# Altium PCB pcb.PcbDoc
Units mm, origin at the board's own origin, x right, y up, seen from the top; angles counter-clockwise.
Board outline 50 x 22 mm, 2 copper layers (Top Layer, Bottom Layer), stack 1.58 mm thick; 35 components, 21 nets, 103 pads, 67 vias.
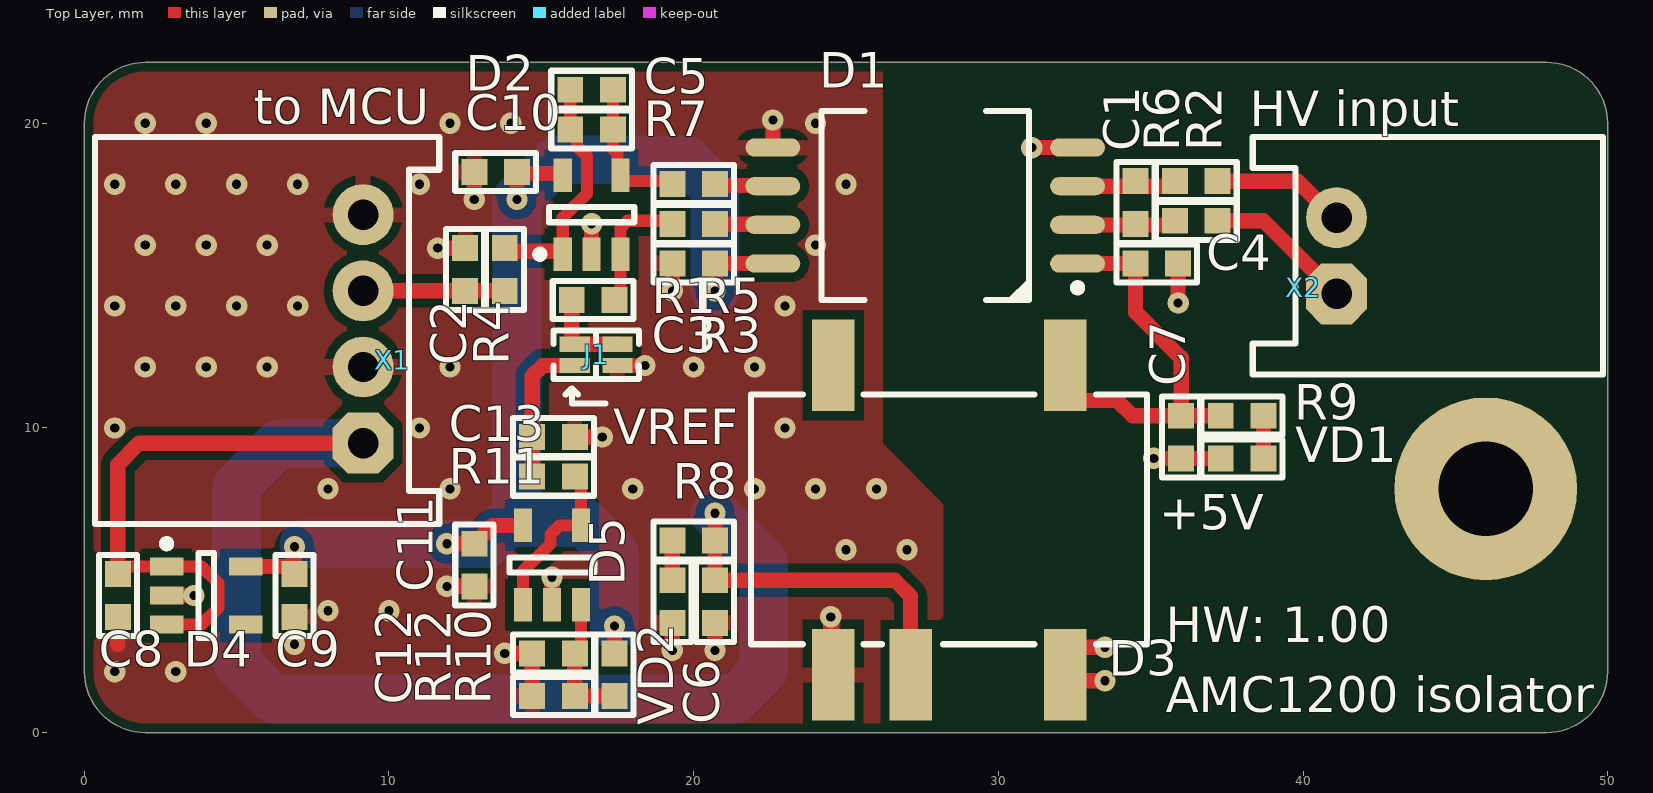
[diagram p0: Top Layer view]
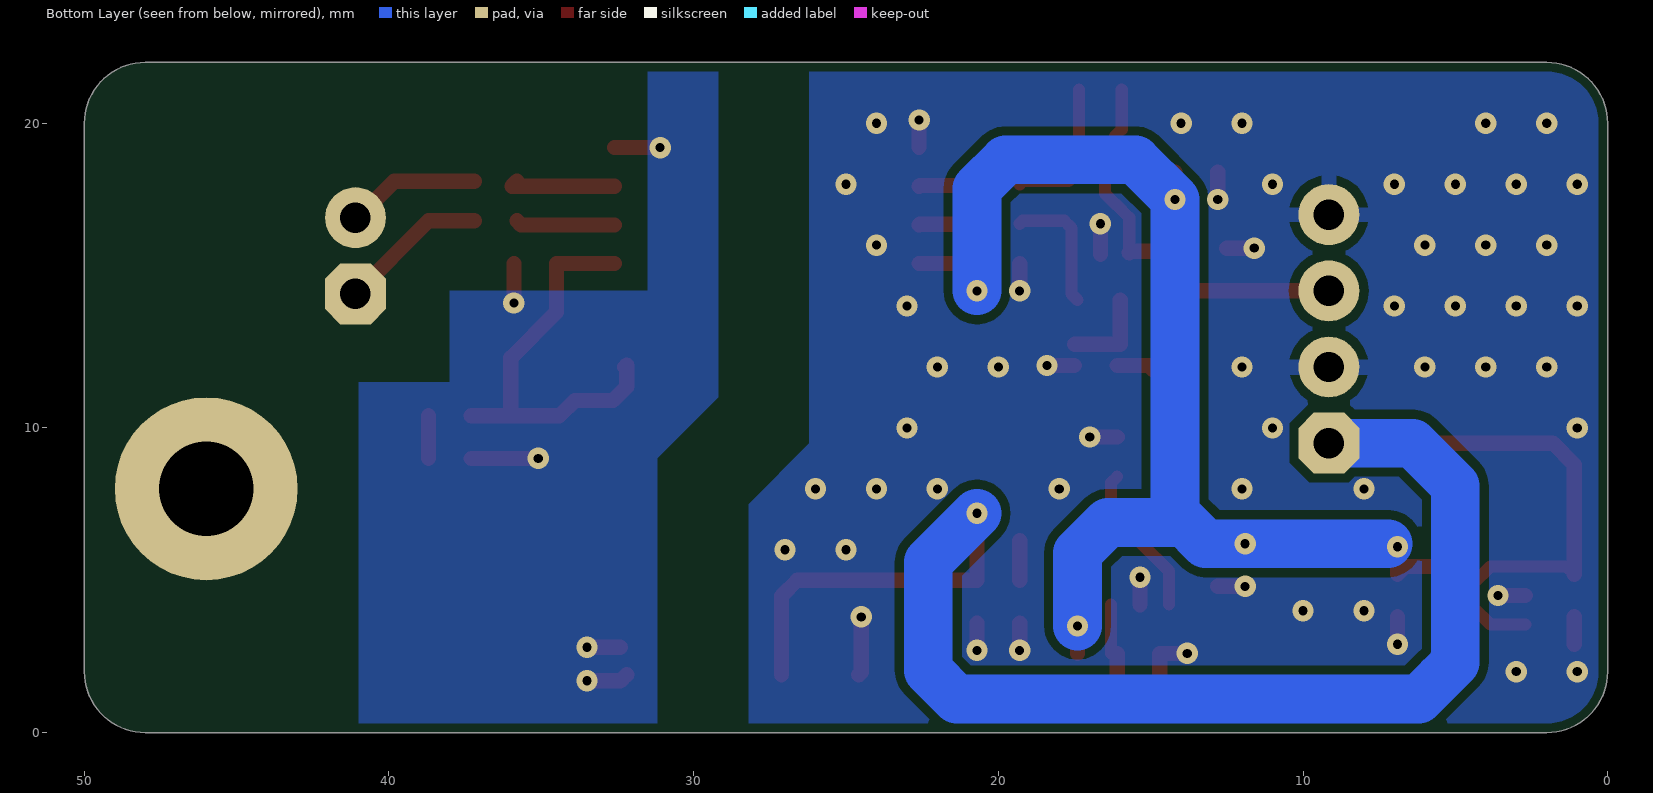
[diagram p1: Bottom Layer view, seen from below]
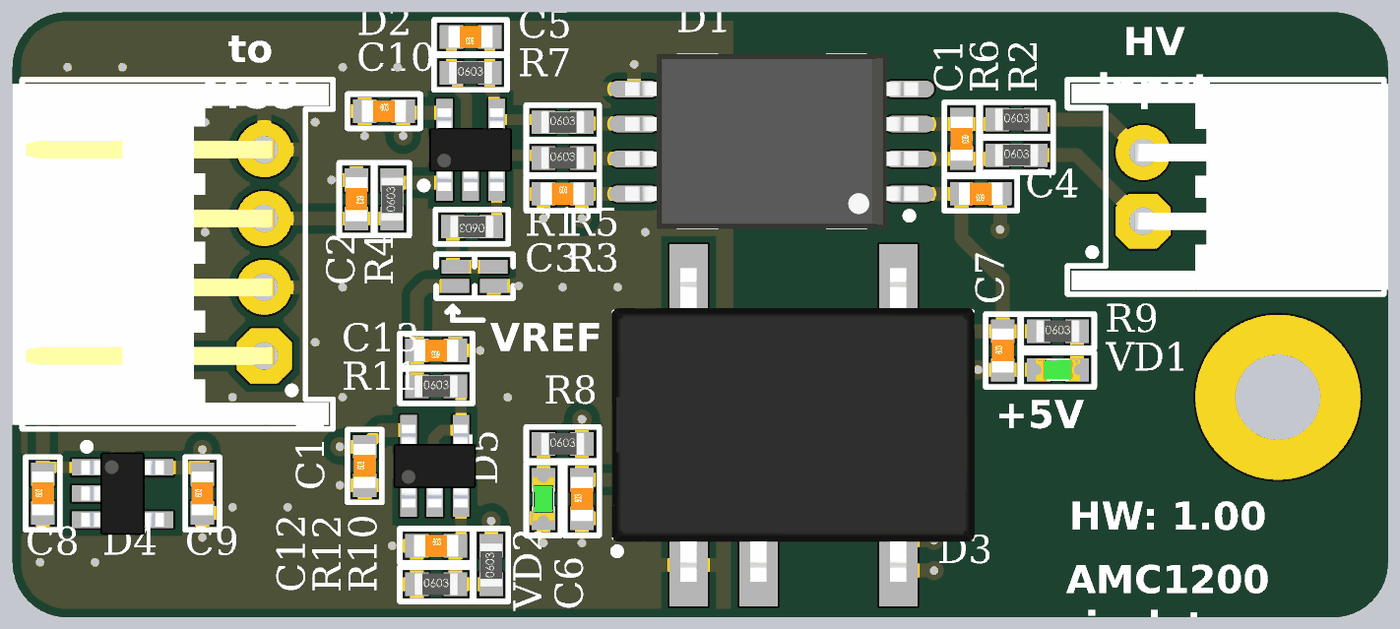
[diagram p2: 3D render of the assembled board from above, using the file's embedded part models]

## Layer stack, top to bottom
Top Solder: solder mask 0.0102, Solder Resist, Dk 3.5
Top Layer: signal copper 0.0356
Dielectric 1: dielectric 1.509, FR-4, Dk 4.8
Bottom Layer: signal copper 0.0356
Bottom Solder: solder mask 0.0102, Solder Resist, Dk 3.5

## Board outline
2,0 cw(c2,2) 0,2 0,20 cw(c2,20) 2,22 48,22 cw(c48,20) 50,20 50,2 cw(c48,2) 48,0

## Design rules (kind name [scope] priority, off if disabled: settings)
BoardOutlineClearance [All] p1: gap=0.3 ignorepadtopadclearanceinfootprint=FALSE
Clearance Clearance_MultiLayerPad [OnLayer('Multi-Layer') and IsPad] p1: gap=0.3 ignorepadtopadclearanceinfootprint=FALSE except(0: Arc-Hole Track-Hole SMDPad-Hole THPad-Hole Via-Hole Fill-Hole Poly-Hole Region-Hole Text-Hole)
Clearance Clearance_Polygon [InPolygon] p2: gap=0.2 ignorepadtopadclearanceinfootprint=FALSE except(0: Arc-Hole Track-Hole SMDPad-Hole THPad-Hole Via-Hole Fill-Hole Poly-Hole Region-Hole Text-Hole; 0.3: Arc-Poly Arc-Region Track-Poly Track-Region SMDPad-Poly SMDPad-Region THPad-Poly THPad-Region Via-Poly Via-Region Fill-Poly Fill-Region Poly-Poly Poly-Region Region-Region)
Clearance [All] p3: gap=0.2 ignorepadtopadclearanceinfootprint=FALSE except(0: Arc-Hole Track-Hole SMDPad-Hole THPad-Hole Via-Hole Fill-Hole Poly-Hole Region-Hole Text-Hole)
ComponentClearance [All] p1: gap=0.2 collisioncheckmode=3 verticalgap=0.2 showdistances=FALSE
DiffPairsRouting [All] p1: maxlimit=0.4 minlimit=0.2 mostfreqgap=0.2 toplayer_minwidth=0.2 toplayer_maxwidth=0.3 toplayer_prefwidth=0.2 bottomlayer_minwidth=0.2 bottomlayer_maxwidth=0.3 bottomlayer_prefwidth=0.2 maxuncoupledlength=12.7
Height [All] p1: minheight=0 maxheight=50 prefheight=12.7
HoleSize [All] p1: absolutevalues=TRUE maxlimit=10 minlimit=0.2 maxpercent=80.000 minpercent=20.000
HoleToHoleClearance [All] p1: gap=0.3 allowstackedmicrovias=TRUE
MinimumSolderMaskSliver [All] p1: minsoldermaskwidth=0.05
PlaneClearance [All] p1: clearance=0.5
PlaneConnect [All] p1: planeconnectstyle=Relief reliefexpansion=0.5 reliefentries=4 reliefconductorwidth=0.5 reliefairgap=0.3
PolygonConnect PolygonConnect_PadGND [InNet('GND') and IsPad] p1: connectstyle=Relief reliefconductorwidth=0.5 reliefentries=4 polygonreliefangle="90 Angle" airgapwidth=0.3
PolygonConnect PolygonConnect_Via [IsVia] p2: connectstyle=Direct reliefconductorwidth=0.254 reliefentries=4 polygonreliefangle="90 Angle" airgapwidth=0.254
PolygonConnect [All] p3: connectstyle=Relief reliefconductorwidth=0.5 reliefentries=4 polygonreliefangle="90 Angle" airgapwidth=0.3
RoutingTopology [All] p1: topology=Vertical
RoutingVias [All] p1: holewidth=0.2 width=0.4 viastyle="Through Hole" minholewidth=0.2 minwidth=0.4 maxholewidth=0.5 maxwidth=1.2
SilkToSilkClearance [All] p1: silktosilkclearance=0.05
SilkToSolderMaskClearance [IsPad] p1: minsilkscreentomaskgap=0.05 clearancetoexposedcopper=TRUE
SolderMaskExpansion [All] p1: expansion=0.075 istentingtop=FALSE
Width [All] p1: maxlimit=10 minlimit=0.2 preferedwidth=0.2
19 further rules are at their usual default settings.

## Components (designator, comment, footprint, x,y, rotation, side; value= is the part's Value field where it differs from the comment)
C1 "Ceramic capacitor, 330pF, NPO, ±10%, 50V, 603, -55...+125°C" "CAP: 0603" 34.5,17.4 r270 top value=330pF
C2 "Ceramic capacitor, 0.01μF, X7R, ±10%, 50V, 603, -55...+125°C" "CAP: 0603" 12.5,15.2 r270 top value=0.01μF
C3 "Ceramic capacitor, 0.1μF, X7R, ±10%, 50V, 603, -55...+125°C" "CAP: 0603" 20,15.4 r0 top value=0.1μF
C4 "Ceramic capacitor, 0.1μF, X7R, ±10%, 50V, 603, -55...+125°C" "CAP: 0603" 35.2,15.4 r180 top value=0.1μF
C5 "Ceramic capacitor, 180pF, NPO, ±5%, 50V, 603, -55...+125°C" "CAP: 0603" 16.65,21.1 r180 top value=180pF
C6 "Ceramic capacitor, 4.7μF, X7R, ±10%, 6.3V, 603, -55...+125°C" "CAP: 0603" 20.7,4.3 r90 top value=4.7μF
C7 "Ceramic capacitor, 4.7μF, X7R, ±10%, 6.3V, 603, -55...+125°C" "CAP: 0603" 36,9.7 r90 top value=4.7μF
C8 "Ceramic capacitor, 0.1μF, X7R, ±10%, 50V, 603, -55...+125°C" "CAP: 0603" 1.1,4.5 r90 top value=0.1μF
C9 "Ceramic capacitor, 0.1μF, X7R, ±10%, 50V, 603, -55...+125°C" "CAP: 0603" 6.9,4.5 r90 top value=0.1μF
C10 "Ceramic capacitor, 0.1μF, X7R, ±10%, 50V, 603, -55...+125°C" "CAP: 0603" 13.5,18.4 r0 top value=0.1μF
C11 "Ceramic capacitor, 0.1μF, X7R, ±10%, 50V, 603, -55...+125°C" "CAP: 0603" 12.8,5.5 r90 top value=0.1μF
C12 "Ceramic capacitor, 0.1μF, X7R, ±10%, 50V, 603, -55...+125°C" "CAP: 0603" 15.4,2.6 r0 top value=0.1μF
C13 "Ceramic capacitor, 0.1μF, X7R, ±10%, 50V, 603, -55...+125°C" "CAP: 0603" 15.4,9.7 r180 top value=0.1μF
D1 "IC isolator amplifier, Differential, 100 kHz, 2.7...5.5V, -40...+105°C, 8-SOIC" 8-SOIC-W 27.6,17.3 r180 top
D2 "IC op amplifier, Rail-to-Rail, 20 MHz, 2.7...5.5V, -40...+125°C, SOT23-5" SOT23-5 16.65,17 r90 top
D3 "DC/DC converter, isolator, 5V 200mA, -40...+105°C, SMD-8" "MOD: B0505XT-1WR3" 24.58,1.9 r0 top
D4 "Linear voltage regulator, input 4...24V, 0.5V, output 3.3V, 0.15A, -40...+85°C, SOT23-6" SOT23-5 4,4.5 r0 top
D5 "IC op amplifier, Rail-to-Rail, 20 MHz, 2.7...5.5V, -40...+125°C, SOT23-5" SOT23-5 15.35,5.5 r90 top
J1 "=Valuemanufacturerpartnumber" "CON: JUMPER x2" 16.1,12.4 r270 top
R1 "Resistor film, 1k, ±1%, 603, 0.1W, -55...+125°C" "RES: 0603" 16.7,14.2 r180 top value=1k
R2 "Resistor film, 22R, ±1%, 603, 0.1W, -55...+125°C" "RES: 0603" 36.5,16.8 r0 top value=22R
R3 "Resistor film, 1k3, ±1%, 603, 0.1W, -55...+125°C" "RES: 0603" 20,16.7 r0 top value=1k3
R4 "Resistor film, 120R, ±5%, 603, 0.1W, -55...+125°C" "RES: 0603" 13.8,15.2 r90 top value=120R
R5 "Resistor film, 1k3, ±1%, 603, 0.1W, -55...+125°C" "RES: 0603" 20,18 r0 top value=1k3
R6 "Resistor film, 22R, ±1%, 603, 0.1W, -55...+125°C" "RES: 0603" 36.5,18.1 r0 top value=22R
R7 "Resistor film, 1k, ±1%, 603, 0.1W, -55...+125°C" "RES: 0603" 16.65,19.8 r0 top value=1k
R8 "Resistor film, 1k, ±1%, 603, 0.1W, -55...+125°C" "RES: 0603" 20,6.3 r0 top value=1k
R9 "Resistor film, 1k, ±1%, 603, 0.1W, -55...+125°C" "RES: 0603" 38,10.4 r0 top value=1k
R10 "Resistor film, 1k, ±1%, 603, 0.1W, -55...+125°C" "RES: 0603" 17.4,1.9 r90 top value=1k
R11 "Resistor film, 22R, ±1%, 603, 0.1W, -55...+125°C" "RES: 0603" 15.4,8.4 r0 top value=22R
R12 "Resistor film, 1k, ±1%, 603, 0.1W, -55...+125°C" "RES: 0603" 15.4,1.2 r0 top value=1k
VD1 "LED, 20mA, 2V, 603, -55...+150°C" "LED: 0603G" 38,9 r180 top
VD2 "LED, 20mA, 2V, 603, -55...+150°C" "LED: 0603G" 19.3,4.3 r270 top
X1 "Connector, 4pin, 2.54mm, 250VAC, 3A" "CON: CWF-4R" 9.15,13.25 r90 top
X2 "Connector, 2pin, 2.54mm, 250VAC, 3A" "CON: CWF-2R" 41.1,15.65 r90 top

## Footprints (in the part's own frame and the unit in brackets; to place one, negate y for a bottom-side part, rotate by r counter-clockwise, add the part's x,y. Pads: shape width x height; smd on the part's side, far side on the other; paste and mask are expansions set on the pad)
8-SOIC-W [mm] "pitch 1.27 mm, isolator"
  oval 1.8x0.6 smd: 1(-5,1.905) 2(-5,0.635) 3(-5,-0.635) 4(-5,-1.905) 5(5,-1.905) 6(5,-0.635) 7(5,0.635) 8(5,1.905)
  round 0.5 on Mech1: ""(-4.8,2.7)
  silkscreen extent -5.13,-3.1 3.4,3.1, body extent -5.32,-3.18 5.32,3.17, height 1.7
"CAP: 0603" [mm]
  rect 0.85x0.85 smd: 1(-0.7,0) 2(0.7,0)
  silkscreen extent -1.33,-0.63 1.33,0.63, body extent -0.8,-0.4 0.8,0.4, height 0.3
"CON: CWF-2R" [mm]
  oct 2x2 hole 1: 1(-1.25,0)
  round 2 hole 1: 2(1.25,0)
  round 0.5 on Mech1: ""(-3.3,2.2)
  round 0.5 on Top Overlay: ""(-2.375,1.85)
  silkscreen extent -3.9,-8.75 3.9,2.75, body extent -3.75,-8.9 3.75,2.6, height 5.85
"CON: CWF-4R" [mm]
  oct 2x2 hole 1: 1(-3.75,0)
  round 2 hole 1: 2(-1.25,0) 3(1.25,0) 4(3.75,0)
  round 0.5 on Mech1: ""(-5.8,-1.9)
  round 0.5 on Top Overlay: ""(-5,-1)
  silkscreen extent -6.4,-2.5 6.3,8.8, body extent -6.25,-2.35 6.15,9.15, height 5.8
"CON: JUMPER x2" [mm]
  rect 0.5x1 smd: 1(-0.35,1.4) 2(0.35,1.4) 3(-0.35,0) 4(0.35,0)
  silkscreen extent -0.8,-0.7 0.8,2.1
"LED: 0603G" [mm]
  rect 0.85x0.85 smd: 1(-0.7,0) 2(0.7,0)
  silkscreen extent -1.33,-0.63 1.33,0.63, body extent -0.8,-0.4 0.8,0.4, height 0.6
"MOD: B0505XT-1WR3" [mm]
  rect 1.4x3 smd: 1(0,0) 2(2.54,0) 4(7.62,0) 5(7.62,10.16) 8(0,10.16)
  round 0.5 on Top Overlay: ""(-2.6,0.5)
  round 0.5 on Mech1: ""(-2.3,-0.1)
  silkscreen extent -2.7,1 10.3,9.2, body extent -2.8,-0.6 10.4,10.8, height 7.25
"RES: 0603" [mm]
  rect 0.85x0.85 smd: 1(-0.7,0) 2(0.7,0)
  silkscreen extent -1.33,-0.63 1.33,0.63, body extent -0.8,-0.4 0.8,0.4, height 0.44
SOT23-5 [mm] "pitch 0.95 mm"
  rect 1.1x0.6 smd: 1(-1.3,0.95) 2(-1.3,0) 3(-1.3,-0.95) 4(1.3,-0.95) 5(1.3,0.95)
  round 0.5 on Mech1: ""(-1.1,1.1)
  silkscreen extent -1.42,-1.4 0.25,1.82, body extent -1.5,-1.5 1.5,1.5, height 1.3

## Part data
C1: library part Ceramic_0603, Manufacturer=Samsung, Package=0603, PartNumber=CL10C331JB8NNNC, Temperature=-55...+125°C, Tolerance=±10%, TypeCapacitor="Ceramic capacitor", TypeDielectric=NPO, Voltage=50V, HelpURL=https://www.digikey.com/product-detail/en/samsung-electro-mechanics/CL10C331JB8NNNC/1276-1073-1-ND/3889159, ValueManufacturerPartNumber="Ceramic capacitor, 330pF, NPO, ±10%, 50V, 603, -55...+125°C"
C2: library part Ceramic_0603, Manufacturer=Samsung, Package=0603, PartNumber=CL10B103KB8NNNC, Temperature=-55...+125°C, Tolerance=±10%, TypeCapacitor="Ceramic capacitor", TypeDielectric=X7R, Voltage=50V, HelpURL=https://www.digikey.com/product-detail/en/samsung-electro-mechanics/CL10B103KB8NNNC/1276-1009-1-ND/3889095, ValueManufacturerPartNumber="Ceramic capacitor, 0.01μF, X7R, ±10%, 50V, 603, -55...+125°C"
C3 C4 C8 C9 C10 C11 C12 C13: library part Ceramic_0603, Manufacturer=Samsung, Package=0603, PartNumber=CL10B104KB8WPND, Temperature=-55...+125°C, Tolerance=±10%, TypeCapacitor="Ceramic capacitor", TypeDielectric=X7R, Voltage=50V, HelpURL=https://www.digikey.com/product-detail/en/samsung-electro-mechanics/CL10B104KB8WPND/1276-CL10B104KB8WPNDCT-ND/11488014, ValueManufacturerPartNumber="Ceramic capacitor, 0.1μF, X7R, ±10%, 50V, 603, -55...+125°C"
C5: library part Ceramic_0603, Manufacturer=Samsung, Package=0603, PartNumber=CL10C181JB8NNNC, Temperature=-55...+125°C, Tolerance=±5%, TypeCapacitor="Ceramic capacitor", TypeDielectric=NPO, Voltage=50V, HelpURL=https://www.digikey.com/en/products/detail/samsung-electro-mechanics/CL10C181JB8NNNC/3886913, ValueManufacturerPartNumber="Ceramic capacitor, 180pF, NPO, ±5%, 50V, 603, -55...+125°C"
C6 C7: library part Ceramic_0603, Manufacturer=Samsung, Package=0603, PartNumber=CL10B475KQ8NQNC, Temperature=-55...+125°C, Tolerance=±10%, TypeCapacitor="Ceramic capacitor", TypeDielectric=X7R, Voltage=6.3V, HelpURL=https://www.digikey.com/en/products/detail/samsung-electro-mechanics/CL10B475KQ8NQNC/3887745, ValueManufacturerPartNumber="Ceramic capacitor, 4.7μF, X7R, ±10%, 6.3V, 603, -55...+125°C"
D1: library part AMC1200BDWVR, "Isolator amplifier", Manufacturer="Texas Instruments", Package=8-SOIC, Temperature=-40...+105°C, ComponentType="IC isolator amplifier", GainBandwidth="100 kHz", HelpURL=https://www.digikey.com/product-detail/en/texas-instruments/AMC1200BDWVR/296-39898-1-ND/5177775, OutputType=Differential, PartNumber=AMC1200BDWVR, Supply=2.7...5.5V, ValueManufacturerPartNumber="IC isolator amplifier, Differential, 100 kHz, 2.7...5.5V, -40...+105°C, 8-SOIC"
D2 D5: library part TSV991ILT, "OP amplifier", Manufacturer=STMicroelectronics, Package=SOT23-5, Temperature=-40...+125°C, ComponentType="IC op amplifier", GainBandwidth="20 MHz", HelpURL=https://www.digikey.com/product-detail/en/stmicroelectronics/TSV991ILT/497-6001-1-ND/1578484, OutputType=Rail-to-Rail, PartNumber=TSV991ILT, Supply=2.7...5.5V, ValueManufacturerPartNumber="IC op amplifier, Rail-to-Rail, 20 MHz, 2.7...5.5V, -40...+125°C, SOT23-5"
D3: library part B0505XT-1WR3, "DC/DC converter", Manufacturer=Mornsun, OutputVoltage="5V 200mA", Package=SMD-8, Temperature=-40...+105°C, ComponentType="DC/DC converter", HelpURL=https://www.mornsun-power.com/html/products/35/0.25-3w-smd.html, OutputType=isolator, PartNumber=B0505XT-1WR3, ValueManufacturerPartNumber="DC/DC converter, isolator, 5V 200mA, -40...+105°C, SMD-8"
D4: library part AP2204K-3.3TRG1, "Linear voltage regulator", CurrentOutput=0.15A, Manufacturer="Diodes Incorporated", Package=SOT23-6, Temperature=-40...+85°C, VoltageInput="input 4...24V", VoltageOutput="output 3.3V", ComponentType="Linear voltage regulator", HelpURL=https://www.digikey.com/product-detail/en/diodes-incorporated/AP2204K-3.3TRG1/AP2204K-3.3TRG1DICT-ND/4505288, MaxDropout=0.5V, PartNumber=AP2204K-3.3TRG1, ValueManufacturerPartNumber="Linear voltage regulator, input 4...24V, 0.5V, output 3.3V, 0.15A, -40...+85°C, SOT23-6"
J1: library part Jumper_double, CommentText="\"Перемычка\""
R1 R7 R8 R9 R10 R12: library part Resistor_0603, Manufacturer=Yageo, Package=0603, PartNumber=RC0603FR-071KL, Power=0.1W, Temperature=-55...+125°C, Tolerance=±1%, TypeResistor="Resistor film", HelpURL=https://www.digikey.com/product-detail/en/yageo/RC0603FR-071KL/311-1-00KHRCT-ND/729790, ValueManufacturerPartNumber="Resistor film, 1k, ±1%, 603, 0.1W, -55...+125°C"
R2 R6 R11: library part Resistor_0603, Manufacturer=Yageo, Package=0603, PartNumber=RC0603FR-0722RL, Power=0.1W, Temperature=-55...+125°C, Tolerance=±1%, TypeResistor="Resistor film", HelpURL=https://www.digikey.com/product-detail/en/yageo/RC0603FR-0722RL/311-22-0HRCT-ND/730002, ValueManufacturerPartNumber="Resistor film, 22R, ±1%, 603, 0.1W, -55...+125°C"
R3 R5: library part Resistor_0603, Manufacturer=Yageo, Package=0603, PartNumber=RC0603FR-071K3L, Power=0.1W, Temperature=-55...+125°C, Tolerance=±1%, TypeResistor="Resistor film", HelpURL=https://www.digikey.com/product-detail/en/yageo/RC0603FR-071K3L/311-1-30KHRCT-ND/729805, ValueManufacturerPartNumber="Resistor film, 1k3, ±1%, 603, 0.1W, -55...+125°C"
R4: library part Resistor_0603, Manufacturer=Yageo, Package=0603, PartNumber=RC0603JR-07120RL, Power=0.1W, Temperature=-55...+125°C, Tolerance=±5%, TypeResistor="Resistor film", HelpURL=https://www.digikey.com/product-detail/en/yageo/RC0603JR-07120RL/311-120GRCT-ND/729653, ValueManufacturerPartNumber="Resistor film, 120R, ±5%, 603, 0.1W, -55...+125°C"
VD1 VD2: library part LED_single, Color=GREEN, Current=20mA, Manufacturer=Wurth, Package=0603, PartNumber=150060VS75000, Temperature=-55...+150°C, VoltageDrop=2V, HelpURL=https://www.digikey.com/product-detail/en/w-rth-elektronik/150060VS75000/732-4980-1-ND/4489904, TypeDiode=LED, ValueManufacturerPartNumber="LED, 20mA, 2V, 603, -55...+150°C"
X1: library part CWF-4, CurrentMax=3A, Manufacturer=Connfly, PartNumber=CWF-4R, VoltageMax=250VAC, CommentText="\"Выход\"", HelpURL=https://www.chipdip.ru/product/cwf-4r-ds1069-4-mr, Multichannel=4pin, Pitch=2.54mm, TypeConnector=Connector, ValueManufacturerPartNumber="Connector, 4pin, 2.54mm, 250VAC, 3A"
X2: library part CWF-2, CurrentMax=3A, Manufacturer=Connfly, PartNumber=CWF-2R, VoltageMax=250VAC, CommentText="\"Вход\"", HelpURL=https://www.chipdip.ru/product/cwf-2r-ds1069-2-mr, Multichannel=2pin, Pitch=2.54mm, TypeConnector=Connector, ValueManufacturerPartNumber="Connector, 2pin, 2.54mm, 250VAC, 3A"

## Free pads (board coordinates)
  round 6 hole 3.1 mask+0.075: MH(46,8)

## Via types
v1: diameter 0.7, hole 0.3, Top Layer to Bottom Layer, tented both sides, 67 vias

## Nets (pads, with @x,y where several pads share a name; then routed paths per layer and width w, separated by ;. In a path a pad name is that pad's centre, name@x,y a point inside that pad or via, vN(x,y) a via of type N, cw(c..) or ccw(c..) an arc to the next point about the centre after c; other vN are vias at no path point)
+1.65V: C13.2 J1.4 R11.1 | length 4.8
  Top Layer w0.5: R11.1 C13.2 14.7,11.7 15.05,12.05 J1.4
+3.3V: C3.2 C9.2 C10.2 C11.2 D1.8 D2.5 D4.5 D5.5 R10.2 | length 46.3
  Top Layer w0.5: D4.5 6.65,5.45 C9.2 v1(6.9,6.1) ; v1(11.9,6.2) C11.2 13.4,6.8 D5.5 ; v1(14.2,17.5) C10.2 14.25,18.35 15.65,18.35 D2.5 ; R10.2 v1(17.4,3.5) ; v1(20.7,14.5) C3.2 20.703,15.398 22.598,15.398 D1.8
  Bottom Layer w1.6: v1@7.2,6.2 v1(11.9,6.2) 13.2,6.2 13.9,6.9 ; v1(17.4,3.5) 17.4,5.9 16.4,6.9 13.9,6.9 ; v1(20.7,14.5) 20.7,17.863 19.763,18.8 15.5,18.8 v1(14.2,17.5) 14.2,7.2 13.9,6.9
+5V: C6.2 C8.2 D3.2 D4.1 D4.3 R8.2 X1.1 | length 64.3
  Top Layer w0.4: C8.2 1.35,5.45 D4.1 3.85,5.45 4.4,4.9 4.4,4.1 3.85,3.55 D4.3
  Top Layer w0.5: C8.2 1.1,8.8 1.8,9.5 X1.1 ; v1(20.7,7.2) R8.2 C6.2 26.6,5 27.12,4.48 D3.2
  Bottom Layer w1.6: X1.1 6.4,9.5 5,8.1 5,2.3 5.502,1.798 6.2,1.1 21.363,1.1 22.3,2.037 22.3,5.6 v1(20.7,7.2)
+5V-ISO: C4.2 C7.2 D1.1 D3.5 R9.1 | length 13.8
  Top Layer w0.5: D3.5@32.26,12 D3.5 32.2,11.35 32.65,10.9 33.9,10.9 34.4,10.4 C7.2 ; D1.1 32.603,15.398 34.498,15.398 C4.2 34.5,13.8 36,12.3 C7.2 ; R9.1 C7.2
GND: C2.1 C3.1 C6.1 C8.1 C9.1 C10.1 C11.1 C12.1 C13.1 D1.5 D2.2 D3.1 D4.2 D5.2 J1.2 R12.1 VD2.2 X1.2 X1.4 | length 16.9
  Top Layer w0.5: 1.1,2.9 C8.1 ; D4.2 v1(3.6,4.5) ; v1(6.9,2.9) C9.1 ; v1(11.6,15.9) C2.1 ; v1(11.9,4.8) C11.1 ; v1(12.8,17.5) C10.1 ; v1(13.8,2.6) C12.1 R12.1 ; D5.2 v1(15.35,5.1) ; C13.1 v1(17,9.7) ; D2.2 v1(16.65,16.7) ; J1.2 v1(18.4,12.05) ; v1(19.3,2.7) VD2.2 ; v1(19.3,14.5) C3.1 ; v1(20.7,2.7) C6.1 ; D1.5 v1(22.6,20.105) ; v1(24.5,3.8) 24.5,1.98 D3.1
  other v1: 1,2 3,2 8,4 10,4 25,6 27,6 8,8 12,8 18,8 22,8 24,8 26,8 1,10 11,10 23,10 2,12 4,12 6,12 12,12 20,12 22,12 1,14 3,14 5,14 7,14 23,14 2,16 4,16 6,16 24,16 1,18 3,18 5,18 7,18 11,18 25,18 2,20 4,20 12,20 14,20 24,20
GND-ISO: C4.1 C7.1 D1.4 D3.4 VD1.2 | length 7.5
  Top Layer w0.5: v1(31.1,19.2) 31.105,19.205 D1.4 ; D3.4 32.4,1.7 v1(33.5,1.7) ; D3.4@32.4,2.8 v1(33.5,2.8) ; v1(35.1,9) VD1.2 ; v1(35.9,14.1) C4.1
NetC1_1: C1.1 D1.3 R6.1 | length 3.6
  Top Layer w0.5: D1.3 35.965,17.935 R6.1
NetC1_2: C1.2 D1.2 R2.1 | length 3.3
  Top Layer w0.5: D1.2 35.665,16.665 R2.1
NetC2_2: C2.2 R4.1 X1.3 | length 4.7
  Top Layer w0.5: X1.3 C2.2 R4.1
NetC5_1: C5.1 D2.4 R5.1 R7.2 | length 5
  Top Layer w0.4: C5.1 R7.2 17.35,19.15 17.5,19 17.5,18.4 D2.4 17.6,18.2 17.7,18.1 19.4,18.1 R5.1
NetC5_2: C5.2 D2.1 R4.2 R7.1 | length 7.9
  Top Layer w0.4: D2.1 15.7,15.75 15.7,16.9 16.15,17.35 16.166,17.35 16.5,17.684 16.5,18.916 16.175,19.241 16.175,19.575 R7.1 C5.2
  Top Layer w0.5: R4.2@13.8,15.8 15.65,15.8 D2.1@15.7,15.75
NetC12_2: C12.2 D5.3 R10.1 R12.2 | length 4.3
  Top Layer w0.4: C12.2@16.3,2.6 D5.3
  Top Layer w0.5: C12.2 R12.2 R10.1
NetD1_6: D1.6 R5.2 | length 1.9
  Top Layer w0.5: R5.2 20.746,17.954 22.581,17.954 D1.6
NetD1_7: D1.7 R3.2 | length 1.9
  Top Layer w0.5: R3.2 20.718,16.682 22.583,16.682 D1.7
NetD2_3: D2.3 R1.1 R3.1 | length 4.3
  Top Layer w0.4: R1.1 17.6,14.4 D2.3 17.6,16.566 17.834,16.8 19.2,16.8 R3.1
NetD5_1: D5.1 D5.4 R11.2 | length 5.5
  Top Layer w0.4: D5.1 14.4,5.3 15.3,6.2 15.3,6.5 15.6,6.8 D5.4 16.3,8.2 R11.2
NetJ1_1: J1.1 J1.3 R1.2 | length 3
  Top Layer w0.5: R1.2 16,12.75 J1.3 J1.1
NetR2_2: R2.2 X2.1 | length 4.9
  Top Layer w0.5: R2.2 38.7,16.8 X2.1
NetR6_2: R6.2 X2.2 | length 4.4
  Top Layer w0.5: R6.2 39.825,18.1 41.025,16.9 X2.2
NetR8_1: R8.1 VD2.1 | length 1.3
  Top Layer w0.5: VD2.1 R8.1
NetR9_2: R9.2 VD1.1 | length 1.4
  Top Layer w0.5: VD1.1 R9.2
pads on no net: D1. D2. D3. D3.8 D4. D4.4 D5. X1. X2.

## Polygon pours and split planes (outlines as drawn)
GND on Bottom Layer "GND" (solid, pour order 2): 28.2,0 28.2,7.5 26.2,9.5 26.2,22 0,22 0,0
GND-ISO on Bottom Layer "GND" (solid, pour order 1): 29.2,22 29.2,11 31.2,9 31.2,0 41,0 41,11.5 38,11.5 38,14.5 31.5,14.5 31.5,22
GND on Top Layer "GND" (solid, pour order 3): 28.2,0 28.2,7.5 26.2,9.5 26.2,22 0,22 0,0

## Other copper
Top Layer:
  pour cut-out: 28.2,0 28.2,7.5 26.2,9.5 26.2,22 29.2,22 29.2,11 31.2,9 31.2,0
Bottom Layer:
  pour cut-out: 28.2,0 28.2,7.5 26.2,9.5 26.2,22 29.2,22 29.2,11 31.2,9 31.2,0

## Silkscreen, mask and mechanical layers (free items; w line width, h text height)
Top Overlay:
  lines w0.2: 15.8,11.1 16,11.3 ; 16.2,11.1 16,11.3 ; 17.1,10.8 16,10.8 16,11.3
  text "to MCU" at 5.565,19.569 h2
  text "HV input" at 38.251,19.514 h2
  text "VREF" at 17.363,9.069 h2
  text "+5V" at 35.285,6.269 h2
  text "HW: 1.00" at 35.49,2.569 h2
  text "AMC1200 isolator" at 35.49,0.269 h2
Border:
  the board outline again, w0.2

## Dimensions
0,0 to 0,22 on Size
0,22 to 50,22 on Size